# Altium PCB 磁悬浮.PcbDoc
Units mm, origin at the board's own origin, x right, y up, seen from the top; angles counter-clockwise.
Board outline 105.83 x 105.83 mm, 2 copper layers (Top Layer, Bottom Layer), stack 1.58 mm thick; 88 components, 57 nets, 297 pads, 271 vias.
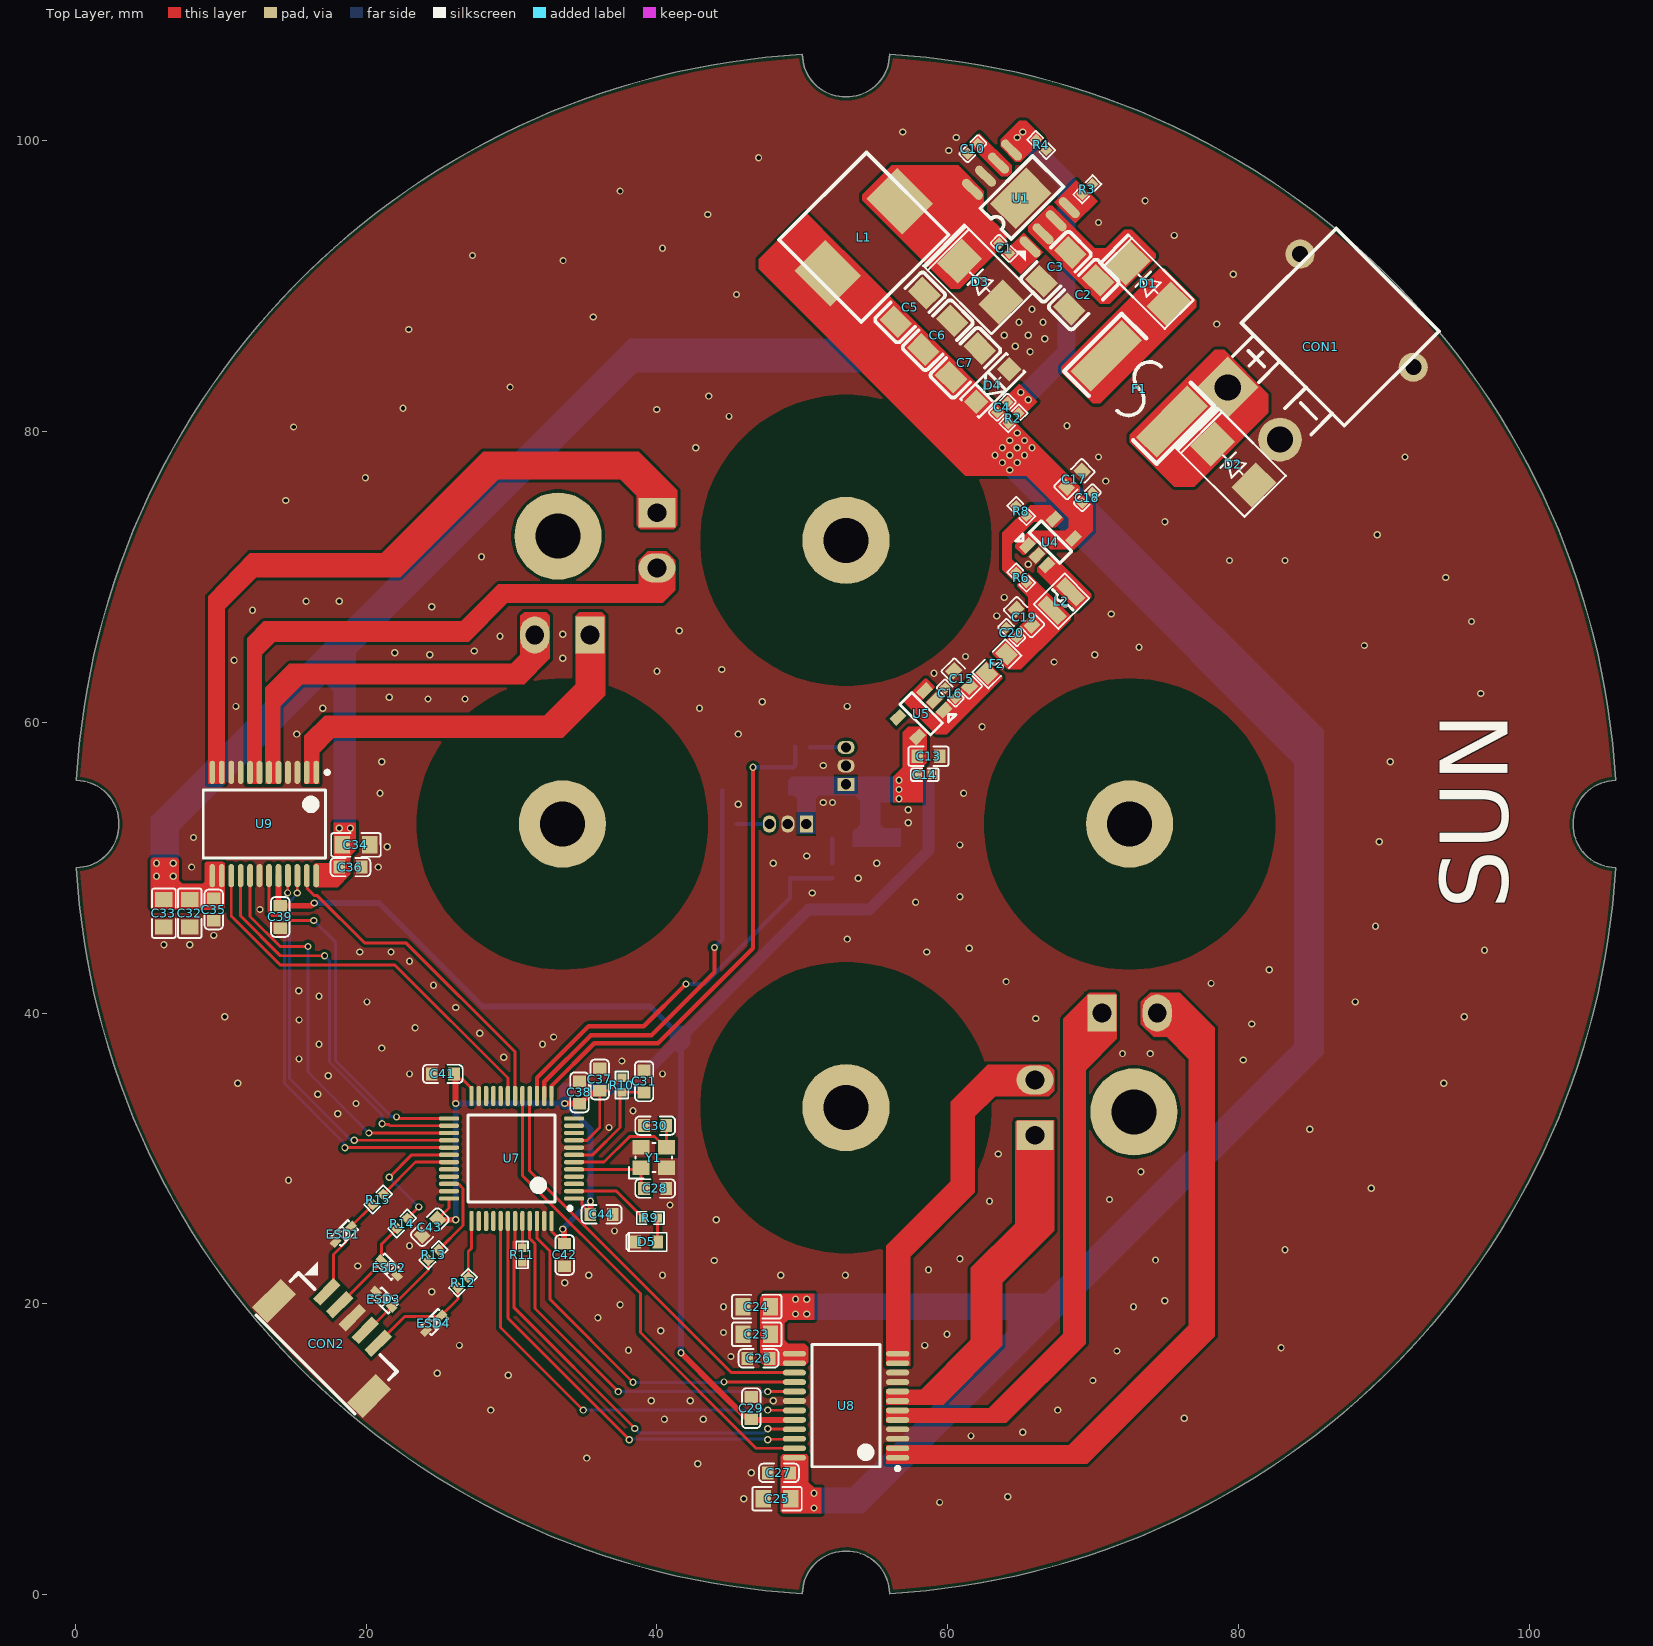
[diagram p0: Top Layer view]
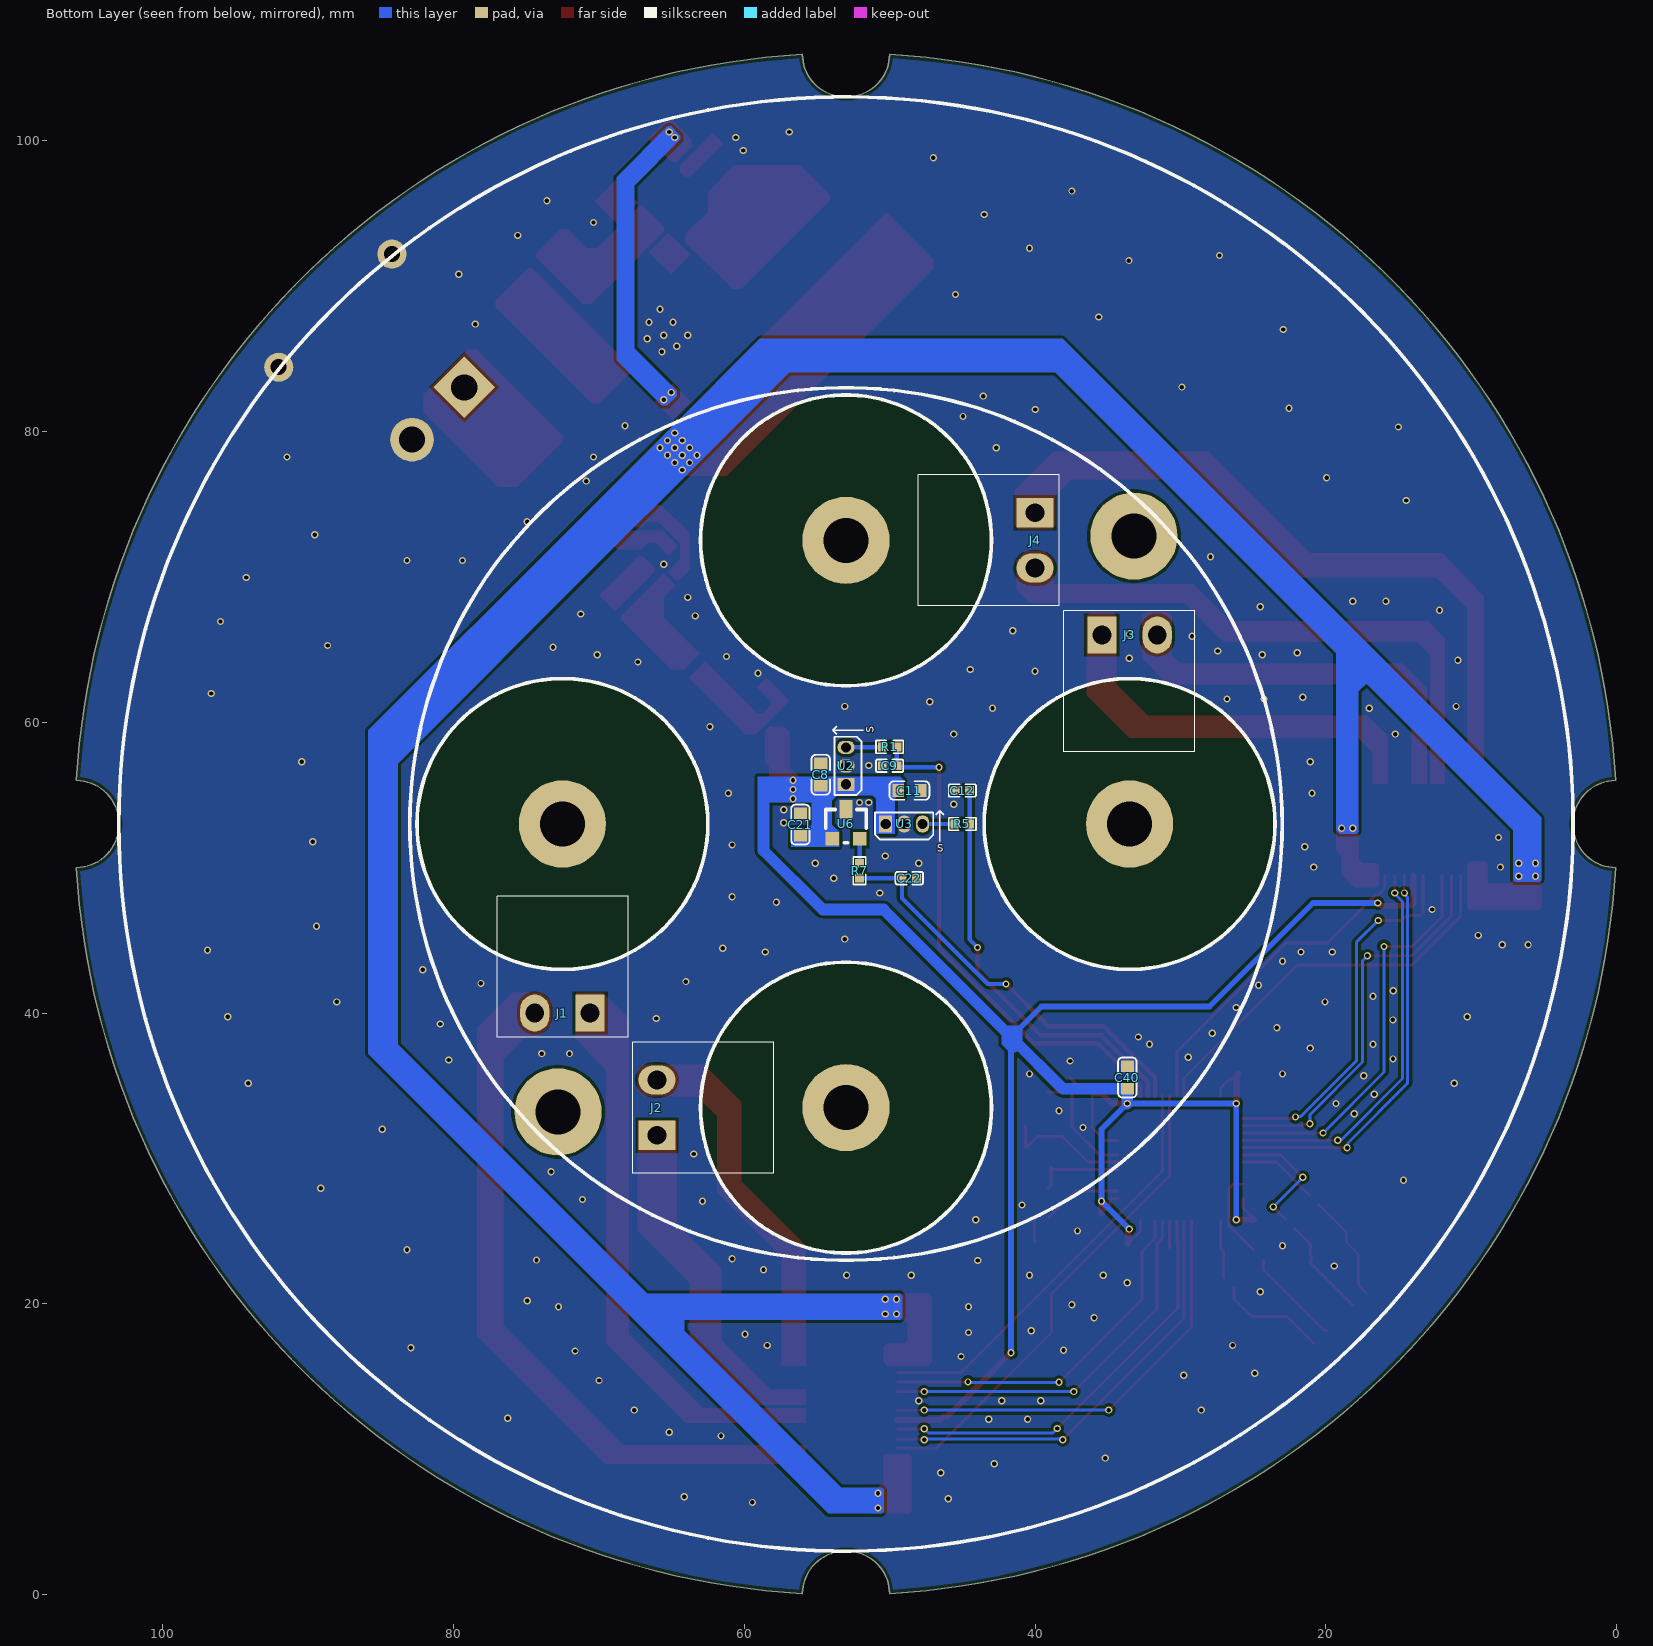
[diagram p1: Bottom Layer view, seen from below]
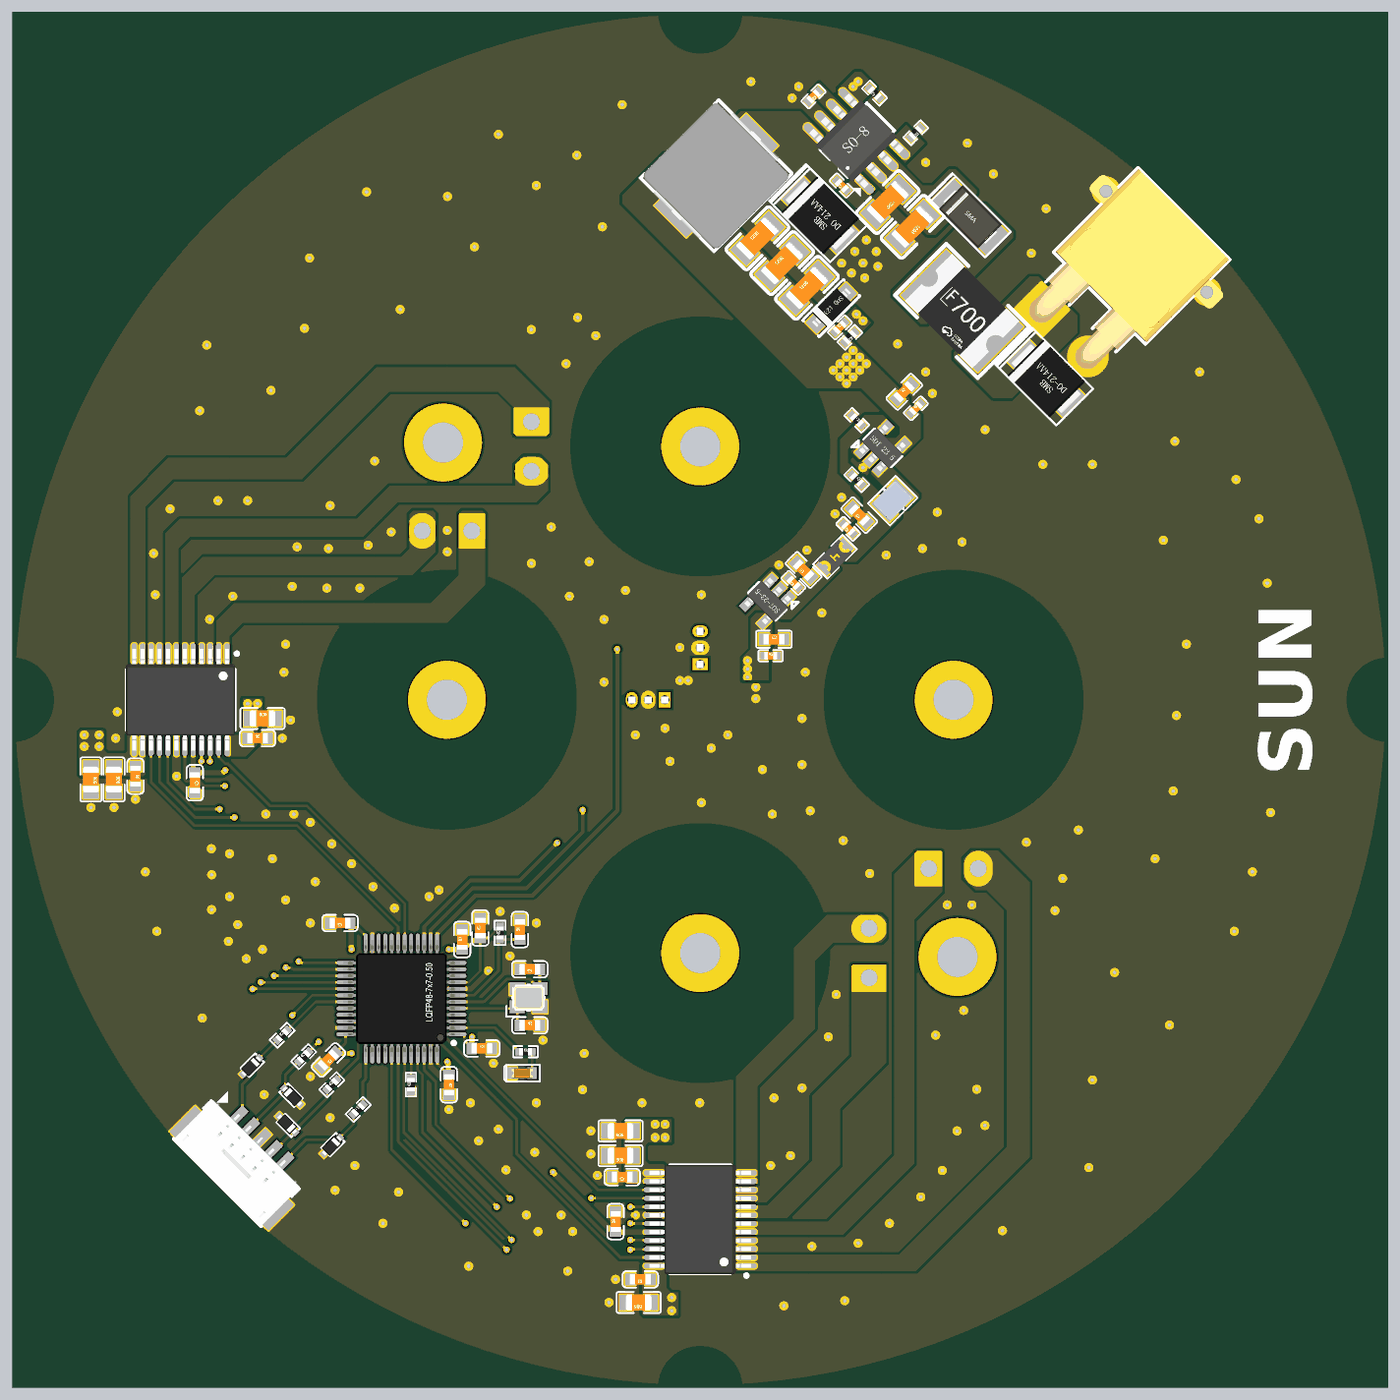
[diagram p2: 3D render of the assembled board from above, using the file's embedded part models]
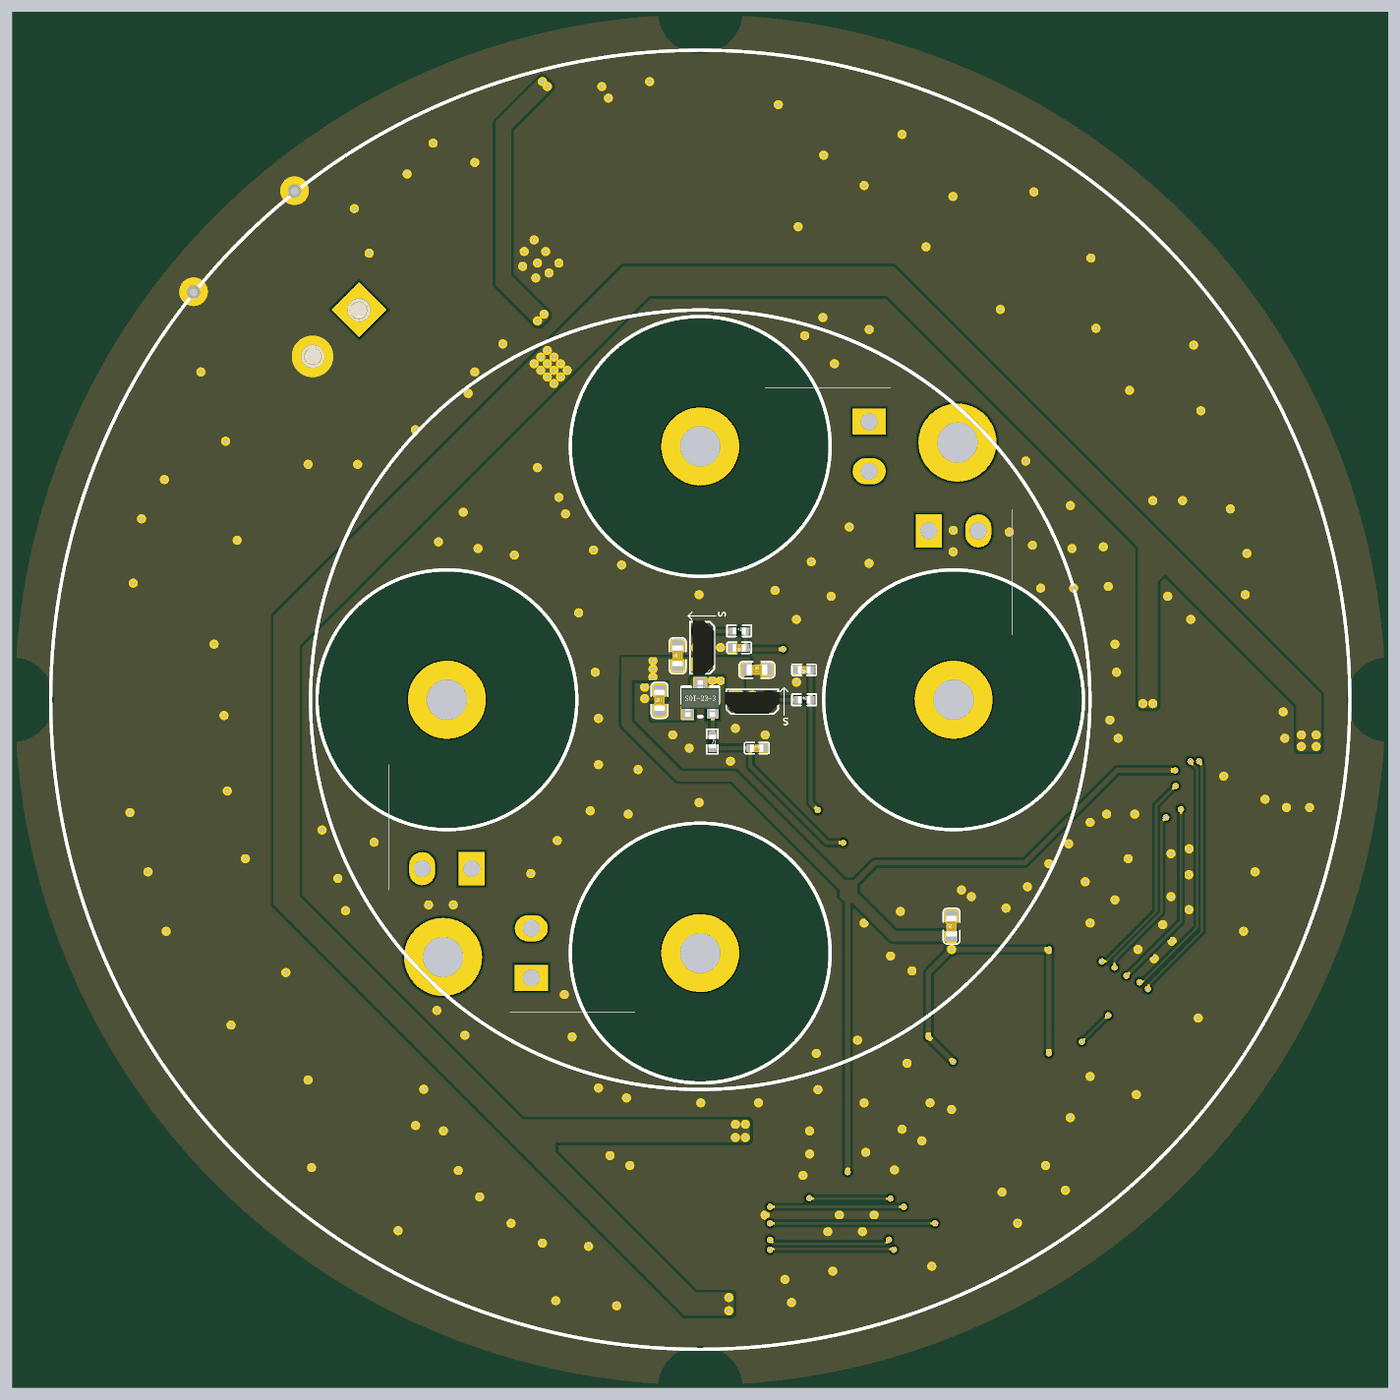
[diagram p3: 3D render of the assembled board from below, using the file's embedded part models]

## Layer stack, top to bottom
Top Solder: solder mask 0.0102, Solder Resist, Dk 3.5
Top Layer: signal copper 0.0356
Dielectric 1: dielectric 1.5086, FR-4, Dk 4.8
Bottom Layer: signal copper 0.0356
Bottom Solder: solder mask 0.0102, Solder Resist, Dk 3.5

## Board outline
0.085,50.001 ccw(c0.043,52.958) 3,53 ccw(c0.043,53.042) 0.085,55.999 cw(c53,53) 50.001,105.915 ccw(c52.96,105.959) 53.004,103 52.996,103 ccw(c53.04,105.959) 55.999,105.915 cw(c53,53) 105.915,55.999 ccw(c105.959,53.04) 103,52.996 ccw(c105.955,52.956) 105.915,50.001 cw(c53,53) 55.999,0.085 ccw(c53.042,0.043) 53,3 ccw(c52.958,0.043) 50.001,0.085 cw(c53,53)

## Design rules (kind name [scope] priority, off if disabled: settings)
BoardOutlineClearance [All] p1: gap=0.254 ignorepadtopadclearanceinfootprint=FALSE except(0: Arc-SplitContinuation Track-SplitContinuation SMDPad-SplitContinuation THPad-SplitContinuation Via-SplitContinuation Fill-SplitContinuation Poly-SplitContinuation Region-SplitContinuation Text-SplitContinuation)
Clearance [All] p1: gap=0.203 ignorepadtopadclearanceinfootprint=FALSE except(0.152: Arc-Arc Arc-Track Arc-SMDPad Arc-THPad Arc-Via Arc-Text Arc-Hole Track-Track Track-SMDPad Track-THPad Track-Via Track-Text Track-Hole SMDPad-SMDPad SMDPad-THPad SMDPad-Via SMDPad-Text SMDPad-Hole THPad-THPad THPad-Via THPad-Text THPad-Hole Via-Via Via-Text Via-Hole Text-Text Text-Hole)
HoleSize [All] p1: absolutevalues=TRUE maxlimit=3.81 minlimit=0.025 maxpercent=80.000 minpercent=20.000
HoleToHoleClearance [All] p1: gap=0 allowstackedmicrovias=TRUE
MinimumSolderMaskSliver [All] p1: minsoldermaskwidth=0
PolygonConnect [All] p1: connectstyle=Direct reliefconductorwidth=0.254 reliefentries=4 polygonreliefangle="90 Angle" airgapwidth=0.254
RoutingVias [All] p1: holewidth=0.3 width=0.5 viastyle="Through Hole" minholewidth=0.3 minwidth=0.5 maxholewidth=0.711 maxwidth=1.27
SilkToSilkClearance [All] p1: silktosilkclearance=0
SilkToSolderMaskClearance [IsPad] p1: minsilkscreentomaskgap=0 clearancetoexposedcopper=TRUE
SolderMaskExpansion [All] p1: expansion=0.102 istentingtop=FALSE
SupplyNets "Schematic Supply Nets_3" [InNet('GND')] p1: voltage=0.000
SupplyNets "Schematic Supply Nets_2" [InNet('3.3V')] p2: voltage=0.000
SupplyNets "Schematic Supply Nets_1" [InNet('+5V')] p3: voltage=0.000
SupplyNets "Schematic Supply Nets" [InNet('+12V')] p4: voltage=0.000
Width [All] p1: maxlimit=1 minlimit=0.15 preferedwidth=0.2
25 further rules are at their usual default settings.

## Components (designator, comment, footprint, x,y, rotation, side; value= is the part's Value field where it differs from the comment)
C1 "100nF/50V" C0402 63.881,92.583 r135 top
C2 "10uF/50V" C1206 69.342,89.408 r225 top
C3 "10uF/50V" C1206 67.437,91.313 r225 top
C4 "330pF/50V" C0402 63.754,81.661 r45 top
C5 "47uF/25V" C1206 57.404,88.519 r45 top
C6 "47uF/25V" C1206 59.309,86.614 r45 top
C7 "47uF/25V" C1206 61.214,84.709 r45 top
C8 "0603/100nF/50V" C0603 54.737,56.388 r90 bottom
C9 "10nF/50V" C0402 50,57 r0 bottom
C10 "100nF/50V" C0402 61.722,99.441 r225 top
C11 "0603/100nF/50V" C0603 48.641,55.3 r180 bottom
C12 "10nF/50V" C0402 45,55.3 r0 bottom
C13 "10uF/10V" C0603 58.674,57.658 r0 top
C14 "100nF/50V" C0402 58.42,56.388 r0 top
C15 "10uF/25V" C0603 60.96,62.992 r135 top
C16 "100nF/50V" C0402 60.171,62.003 r135 top
C17 "4.7uF/25V" C0603 68.707,76.708 r45 top
C18 "100nF/50V" C0402 69.596,75.438 r45 top
C19 "22uF/10V" C0603 65.242,67.219 r135 top
C20 "100nF/50V" C0402 64.389,66.167 r135 top
C21 "0603/100nF/50V" C0603 56.134,52.959 r90 bottom locked
C22 "10nF/50V" C0402 48.649,49.276 r180 bottom locked
C23 "10uF/25V" C0805 46.863,17.907 r180 top
C24 "10uF/25V" C0805 46.863,19.812 r180 top
C25 "10uF/25V" C0805 48.26,6.604 r180 top
C26 "0603/100nF/50V" C0603 46.99,16.256 r180 top
C27 "0603/100nF/50V" C0603 48.387,8.382 r180 top
C28 "10pF/50V/0603/C0G" C0603 39.878,27.94 r0 top
C29 "0603/100nF/50V" C0603 46.482,12.827 r90 top
C30 "10pF/50V/0603/C0G" C0603 39.878,32.258 r180 top
C31 "0603/100nF/50V" C0603 39.116,35.306 r90 top
C32 "10uF/25V" C0805 7.874,46.863 r270 top
C33 "10uF/25V" C0805 6.096,46.863 r270 top
C34 "10uF/25V" C0805 19.304,51.562 r0 top
C35 "0603/100nF/50V" C0603 9.525,47.117 r270 top
C36 "0603/100nF/50V" C0603 18.923,50.038 r0 top
C37 "0603/100nF/50V" C0603 36.068,35.433 r90 top
C38 "0603/10uF/10V" C0603 34.671,34.544 r90 top
C39 "0603/100nF/50V" C0603 14.097,46.609 r270 top
C40 "0603/10uF/10V" C0603 33.655,35.568 r90 bottom
C41 "0603/100nF/50V" C0603 25.273,35.814 r180 top
C42 "0603/100nF/50V" C0603 33.655,23.368 r270 top
C43 "0603/100nF/50V" C0603 24.384,25.273 r225 top
C44 "0603/100nF/50V" C0603 36.195,26.162 r0 top
CON1 "XT30PW-M" XT30PW-M 85.3,85.3 r135 top locked
CON2 "BM05B-GHS-TBT" GH1.25_5LT 18,18 r315 top locked
D1 "SS36" SMA(DO-214AC) 73.787,90.17 r135 top
D2 "SMBJ30CA" SMB(DO-214AA) 79.629,77.724 r135 top
D3 "SS56" SMB(DO-214AA) 62.23,90.297 r135 top
D4 "SMF12CA" SOD123 63.119,83.185 r225 top
D5 "NCD0603R1" LED0603 39.29,24.257 r180 top
ESD1 "PESD3V3S1BA-N" SOD523 18.437,24.787 r225 top
ESD2 "PESD3V3S1BA-N" SOD523 21.59,22.479 r315 top
ESD3 "PESD3V3S1BA-N" SOD523 21.209,20.32 r135 top
ESD4 "PESD3V3S1BA-N" SOD523 24.638,18.669 r225 top
F1 "30V/2.5A" F2920 73.152,82.931 r315 top
F2 "16V/500mA" F0805 63.373,64.008 r225 top
J1 "CON2" "MC 1,5/2-G-3,81" 72.5,40 r0 bottom locked
J2 "CON2" "MC 1,5/2-G-3,81" 66,33.5 r90 bottom locked
J3 "CON2" "MC 1,5/2-G-3,81" 33.5,66 r180 bottom locked
J4 "CON2" "MC 1,5/2-G-3,81" 40,72.5 r270 bottom locked
L1 "15uH/5.4A" CD080538 54.229,93.345 r225 top
L2 "10uH/1.2A" NR2520 67.818,68.326 r225 top
R1 "10R" R0402#1 50,58.3 r180 bottom
R2 "150K" R0402#1 64.516,80.899 r225 top
R3 "45.3K" R0402#1 69.596,96.647 r225 top
R4 "10K" R0402#1 66.421,99.695 r135 top
R5 "10R" R0402#1 45,53 r180 bottom
R6 "105K" R0402#1 65.051,69.95 r315 top
R7 "10R" R0402#1 52.07,49.784 r270 bottom
R8 "20K" R0402#1 65.051,74.522 r315 top
R9 "10K" R0402#1 39.552,25.908 r0 top
R10 "10K" R0402#1 37.592,35.052 r90 top
R11 "1K/0402/5%" R0402#2 30.734,23.368 r90 top
R12 "100R" R0402#1 26.67,21.463 r45 top
R13 "100R" R0402#1 24.638,23.368 r45 top
R14 "100R" R0402#1 22.479,25.527 r45 top
R15 "100R" R0402#1 20.828,27.178 r45 top
U1 "LMR16030PDDAR" SOP8-9 65.024,96.012 r135 top
U2 "HX6286UA" TO-92S 53,57 r90 bottom locked
U3 "HX6286UA" TO-92S 49,53 r180 bottom locked
U4 "TPS560200DBVR" SOT23-5 67.056,72.39 r45 top
U5 "SPX3819M5-L-3-3/TR" SOT23-5 58.166,60.579 r225 top
U6 "HX6286ESO" SOT23 53,53 r180 bottom locked
U7 "STM32F103C8T6" LQFP48 30,30 r180 top locked
U8 "TB6612" SSOP-24_208mil 53,13 r180 top locked
U9 "TB6612" SSOP-24_208mil 13,53 r270 top locked
Y1 "X322512MOB4SI" XTAL_2520 39.786,30.064 r0 top

## Footprints (in the part's own frame and the unit in brackets; to place one, negate y for a bottom-side part, rotate by r counter-clockwise, add the part's x,y. Pads: shape width x height; smd on the part's side, far side on the other; paste and mask are expansions set on the pad)
C0402 [mm]
  rect 0.6x0.6 smd mask+0.05: 1(-0.5,0) 2(0.5,0)
  silkscreen extent -0.94,-0.43 0.94,0.43, body extent -0.5,-0.3 0.5,0.3, height 0.2
C0603 [mm]
  rect 0.8x0.9 smd: 1(-0.77,0) 2(0.77,0)
  silkscreen extent -1.37,-0.64 1.37,0.64, body extent -0.8,-0.4 0.8,0.4, height 0.3
C0805 [mm]
  rect 1.05x1.2 smd: 1(-0.95,0) 2(0.95,0)
  silkscreen extent -1.7,-0.81 1.7,0.81, body extent -1,-0.63 1,0.63, height 0.78
C1206 [mm]
  rect 1.4x1.8 smd: 1(-1.4,0) 2(1.4,0)
  silkscreen extent -2.37,-1.18 2.37,1.18, body extent -1.6,-0.8 1.6,0.8, height 1
CD080538 [mm]
  rect 3x3.5 smd: 1(-3.5,0) 2(3.5,0)
  silkscreen extent -4.25,-4 4.25,4, body extent -4.4,-4.11 4.4,4.1, height 3.8
F0805 [mm]
  rect 1.05x1.2 smd: 1(-0.95,0) 2(0.95,0)
  silkscreen extent -1.6,-0.79 1.6,0.79, body extent -1.15,-0.75 1.15,0.75, height 0.86
F2920 [mm]
  rect 2x5 smd: 1(3.2,0) 2(-3.2,0)
  silkscreen extent -4.5,-2.8 4.5,2.8, body extent -3.68,-2.56 3.68,2.56, height 0.5
GH1.25_5LT [mm]
  rect 0.7x2 smd: 1(-2.5,1.5) 2(-1.25,1.5) 3(0,1.5) 4(1.25,1.5) 5(2.5,1.5)
  rect 1.5x2.8 smd: A(-4.635,-1.5) B(4.635,-1.5)
  silkscreen extent -4.79,-3.06 4.79,2.52, body extent -4.75,-3.06 4.75,1.86, height 4.15
LED0603 [mm]
  rect 0.737x0.9 smd: 1(0.77,0) 2(-0.77,0)
  silkscreen extent -1.38,-0.64 1.38,0.64, body extent -0.81,-0.4 0.81,0.4, height 0.6
LQFP48 [mm] "Thin QFP, 48-Leads, Body 7x7mm, Pitch 0.5mm, IPC High Density"
  oval 1.4x0.3 smd: 1(-4.3,2.75) 2(-4.3,2.25) 3(-4.3,1.75) 4(-4.3,1.25) 5(-4.3,0.75) 6(-4.3,0.25) 7(-4.3,-0.25) 8(-4.3,-0.75) 9(-4.3,-1.25) 10(-4.3,-1.75) 11(-4.3,-2.25) 12(-4.3,-2.75) 25(4.3,-2.75) 26(4.3,-2.25) 27(4.3,-1.75) 28(4.3,-1.25) 29(4.3,-0.75) 30(4.3,-0.25) 31(4.3,0.25) 32(4.3,0.75) 33(4.3,1.25) 34(4.3,1.75) 35(4.3,2.25) 36(4.3,2.75)
  oval 0.3x1.4 smd: 13(-2.75,-4.3) 14(-2.25,-4.3) 15(-1.75,-4.3) 16(-1.25,-4.3) 17(-0.75,-4.3) 18(-0.25,-4.3) 19(0.25,-4.3) 20(0.75,-4.3) 21(1.25,-4.3) 22(1.75,-4.3) 23(2.25,-4.3) 24(2.75,-4.3) 37(2.75,4.3) 38(2.25,4.3) 39(1.75,4.3) 40(1.25,4.3) 41(0.75,4.3) 42(0.25,4.3) 43(-0.25,4.3) 44(-0.75,4.3) 45(-1.25,4.3) 46(-1.75,4.3) 47(-2.25,4.3) 48(-2.75,4.3)
  silkscreen extent -4.15,-3 3,3.55, body extent -4.5,-4.5 4.5,4.5, height 1.45
"MC 1,5/2-G-3,81" [mm] "MC 1,5/2-G-3,81"
  rect 2x2.54 hole 1.3: 1(-1.905,0)
  oval 2x2.54 hole 1.3: 2(1.905,0)
  silkscreen extent -4.52,-8.03 4.49,1.65
NR2520 [mm]
  rect 0.9x2 smd: 1(-0.9,0) 2(0.9,0)
  silkscreen extent -1.5,-1.2 1.5,1.2, body extent -1.26,-1 1.26,1, height 1.21
R0402#1 [mm]
  rect 0.6x0.6 smd mask+0.05: 1(-0.5,0) 2(0.5,0)
  silkscreen extent -0.94,-0.43 0.94,0.43, body extent -0.5,-0.3 0.5,0.3, height 0.2
R0402#2 [mm]
  rect 0.6x0.6 smd: 1(-0.5,0) 2(0.5,0)
  silkscreen extent -0.91,-0.41 0.91,0.41, body extent -0.5,-0.3 0.5,0.3, height 0.2
SMA(DO-214AC) [mm]
  rect 2x2.4 smd: 1(2,0) 2(-2,0)
  silkscreen extent -3,-1.4 3.38,1.4, body extent -2.35,-1.3 2.35,1.3, height 2.1
SMB(DO-214AA) [mm]
  rect 2x2.4 smd: 1(2,0) 2(-2,0)
  silkscreen extent -3.1,-2 3.55,2, body extent -2.8,-1.95 2.8,1.95, height 2.5
SOD123 [mm]
  rect 1.2x1.2 smd: 1(1.646,-0.001) 2(-1.554,-0.001)
  silkscreen extent -2.18,-0.9 2.27,0.9, body extent -1.85,-0.8 1.85,0.8, height 1.2
SOD523 [mm]
  rect 0.7x0.5 smd: 1(-0.75,0) 2(0.75,0)
  silkscreen extent -0.91,-0.48 0.68,0.48, body extent -0.9,-0.45 0.9,0.45, height 0.8
SOP8-9 [mm]
  oval 1.8x0.61 smd: 1(-2.8,1.905) 2(-2.8,0.635) 3(-2.8,-0.635) 4(-2.8,-1.905) 5(2.8,-1.905) 6(2.8,-0.635) 7(2.8,0.635) 8(2.8,1.905)
  rect 2.5x3.5 smd: 9(0,0)
  silkscreen extent -3.3,-2.64 1.5,2.82, body extent -3,-2.45 3,2.45, height 1.7
SOT23 [mil]
  rect 36x36 smd: 1(-37.5,-40) 2(37.5,-40)
  rect 36x50 smd: 3(0,40)
  silkscreen extent -55,-51 55,39, body extent -57,-51 57,59, height 47
SOT23-5 [mil]
  rect 39x27 smd: 1(-50.98,37.4) 2(-50.98,0) 3(-50.98,-37.4) 4(50.98,-37.4) 5(50.98,37.4)
  silkscreen extent -65,-59 23,68, body extent -56,-57 54,58, height 47
SSOP-24_208mil [mm] "SOP, 24-Leads, Body 8.20x5.30mm, Pitch 0.65mm, IPC Medium Density"
  oval 1.6x0.4 smd: 1(-3.55,3.575) 2(-3.55,2.925) 3(-3.55,2.275) 4(-3.55,1.625) 5(-3.55,0.975) 6(-3.55,0.325) 7(-3.55,-0.325) 8(-3.55,-0.975) 9(-3.55,-1.625) 10(-3.55,-2.275) 11(-3.55,-2.925) 12(-3.55,-3.575) 13(3.55,-3.575) 14(3.55,-2.925) 15(3.55,-2.275) 16(3.55,-1.625) 17(3.55,-0.975) 18(3.55,-0.325) 19(3.55,0.325) 20(3.55,0.975) 21(3.55,1.625) 22(3.55,2.275) 23(3.55,2.925) 24(3.55,3.575)
  silkscreen extent -3.68,-4.2 2.35,4.45, body extent -3.9,-4.2 3.9,4.2, height 1.85
TO-92S [mm]
  rect 0.9x1.2 hole 0.7 mask+0.102: 1(-1.27,0)
  oval 0.9x1.2 hole 0.7 mask+0.102: 2(0,0) 3(1.27,0)
  silkscreen extent -2,-1.17 2.73,0.92, body extent -2.1,-1.09 2.1,0.58, height 6.78
XT30PW-M [mm]
  rect 3x3 hole 1.8: 1(2.667,5.888)
  round 3 hole 1.8: 2(-2.413,5.888)
  round 2 hole 1.1: A(-5.373,-4.112) B(5.627,-4.112)
  silkscreen extent -4.87,-7.11 5.13,4.12, body extent -6.55,-7.08 6.75,6.87, height 5
XTAL_2520 [mm]
  rect 1.15x1 smd: 1(-0.875,-0.7) 2(0.875,-0.7) 3(0.875,0.7) 4(-0.875,0.7)
  silkscreen extent -1.7,-1.45 1.25,1, body extent -1.25,-1 1.25,1, height 0.8

## Part data
C1 C10 C14 C16 C18 C20: library part 0402/100nF/50V/±10％, "=规格", 参数=100nF/50V, 物料名称=贴片电容, 规格=0402/100nF/50V/±10％
  C1 C10 C18 C20: 厂商型号=±10％, 序号=10053
  C14 C16: 序号=10041
C2 C3: library part 1206/10uF/50V/±20％, "=规格", 厂商型号=±20％, 参数=10uF/50V, 序号=10149, 物料名称=贴片电容, 规格=1206/10uF/50V/±20％
C4: library part 0402/330pF/50V/±10％, "=规格", 厂商型号=±10％, 参数=330pF/50V, 序号=10026, 物料名称=贴片电容, 规格=0402/330pF/50V/±10％
C5 C6 C7: library part 1206/47uF/25V/±20％, "=规格", 厂商型号=±20％, 参数=47uF/25V, 序号=10154, 物料名称=贴片电容, 规格=1206/47uF/25V/±20％
C8 C11 C21 C26 C27 C29 C31 C35 C36 C37 C39 C41 C42 C43 C44: library part C0603, "0603/100nF/50V/X7R/±10％/GRM188R71H104KA93D"
C9 C12 C22: library part 0402/10nF/50V/±10％, "=规格", 参数=10nF/50V, 序号=10048, 物料名称=贴片电容, 规格=0402/10nF/50V/±10％
C13: library part 0603/10uF/10V/±10％, "=规格", 参数=10uF/10V, 序号=10091, 物料名称=贴片电容, 规格=0603/10uF/10V/±10％
C15: library part 0603/10uF/25V/±20％, "=规格", 厂商型号=±20％, 参数=10uF/25V, 序号=10125, 物料名称=贴片电容, 规格=0603/10uF/25V/±20％
C17: library part 0603/4.7uF/25V/±10％, "=规格", 厂商型号=±10％, 参数=4.7uF/25V, 序号=10122, 物料名称=贴片电容, 规格=0603/4.7uF/25V/±10％
C19: library part 0603/22uF/10V/±20％, "=规格", 厂商型号=±20％, 参数=22uF/10V, 序号=10127, 物料名称=贴片电容, 规格=0603/22uF/10V/±20％
C23 C24 C25 C32 C33 C34: library part 0805/10uF/25V/±10％, "=规格", 参数=10uF/25V, 序号=10080, 物料名称=贴片电容, 规格=0805/10uF/25V/±10％
C28 C30: library part C0603, "0603/10pF/50V/C0G/±5％/GCM1885C1H100JA16D"
C38 C40: library part C0603, "0603/10uF/10V/X7R/±10％/GRM188Z71A106KA73D"
CON1: library part XT30/公头/4PIN/卧插/XT30PW-M, "=规格", 厂商名称=AMASS(艾迈斯), 厂商型号=XT30PW-M, 参数=XT30PW-M, 序号=110171, 物料名称=连接座, 物料编号=C431092, 规格=XT30/公头/4PIN/卧插/XT30PW-M, 购买连接=https://item.szlcsc.com/426930.html
CON2: library part GH1.25mm/5PIN/立贴/BM05B-GHS-TBT, "=规格", 厂商名称=JST, 厂商型号=BM05B-GHS-TBT(LF)(SN), 参数=BM05B-GHS-TBT, 序号=110048, 物料名称=连接座, 物料编号=C189891, 规格=GH1.25mm/5PIN/立贴/BM05B-GHS-TBT, 购买连接=https://item.szlcsc.com/207056.html
D1: library part SMA/60V/3A/单向/肖特基二极管/SS36（长电）, "=规格", 厂商名称=CJ(江苏长电/长晶), 厂商型号=SS36, 参数=SS36, 参数2="二极管配置：独立式 正向压降(Vf)：700mV@3A 直流反向耐压(Vr)：60V 平均整流电流(Io)：3A", 序号=40022, 物料名称=肖特基二极管, 物料编号=C2923967, 规格=SMA/60V/3A/单向/肖特基二极管/SS36（长电）, 购买连接=https://item.szlcsc.com/3237782.html
D2: library part SMB/30V/12.4A/双向/TVS元件/SMBJ30CA（伯恩）, "=规格", 厂商名称=BORN(伯恩半导体), 厂商型号=SMBJ30CA, 参数=SMBJ30CA, 参数2="最大钳位电压：48.4V峰值脉冲电流(Ipp)@10/1000us：12.4A 击穿电压：33.3V", 序号=40070, 物料名称=TVS元件, 物料编号=C152098, 规格=SMB/30V/12.4A/双向/TVS元件/SMBJ30CA（伯恩）, 购买连接=https://item.szlcsc.com/163438.html?fromZone=s_s__%2522C152098%2522
D3: library part SMB/60V/5A/单向/肖特基二极管/SS56（长电）, "=规格", 厂商名称=LGE(鲁光), 厂商型号=SS56, 参数=SS56, 参数2="正向压降(Vf)：700mV@5A 直流反向耐压(Vr)：60V 平均整流电流(Io)：5A", 序号=40028, 物料名称=肖特基二极管, 物料编号=C402303, 规格=SMB/60V/5A/单向/肖特基二极管/SS56（长电）, 购买连接=https://item.szlcsc.com/387448.html?fromZone=s_s__%2522C402303%2522
D4: library part SOD123/12V/10A/双向/TVS元件/SMF12CA（长电）, "=规格", 厂商名称=CJ(江苏长电/长晶), 厂商型号=SMF12CA, 参数=SMF12CA, 参数2="反向截止电压(Vrwm)：12V 最大钳位电压：19.9V 峰值脉冲电流(Ipp)@10/1000us：10.1A 击穿电压：13.3V", 序号=40059, 物料名称=TVS元件, 物料编号=C2961203, 规格=SOD123/12V/10A/双向/TVS元件/SMF12CA（长电）, 购买连接=https://item.szlcsc.com/3349401.html?fromZone=s_s__%2522C2961203%2522
D5: library part 0603/20mA/红灯/发光二极管/NCD0603R1, "=规格", 厂商名称=国星光电, 厂商型号=NCD0603R1, 参数=NCD0603R1, 参数2="发光颜色：红色 正向电压(VF)：1.6V~2.6V 功率：65mW 正向电流：20mA 主波长：615nm~630nm 二极管配置：独立二极管 透镜颜色：无色透明透镜 发光强度：80mcd~220mcd 发光角度：130° 工作温度：-30℃~+85℃", 序号=40004, 物料名称=发光二极管, 物料编号=C84263, 规格=0603/20mA/红灯/发光二极管/NCD0603R1, 购买连接=https://item.szlcsc.com/85432.html
ESD1 ESD2 ESD3 ESD4: library part "SOD523/TVS保护/双向/PESD3V3S1BA-N TVS", "=规格", 厂商名称=BORN(伯恩半导体), 厂商型号=PESD3V3S1BA-N, 参数=PESD3V3S1BA-N, 参数2="反向截止电压(Vrwm)：3.3V 最大钳位电压：10V 峰值脉冲电流(Ipp)@10/1000us：10A@8/20us 击穿电压：4V", 序号=40055, 物料名称=TVS, 物料编号=C316037, 规格="SOD523/TVS保护/双向/PESD3V3S1BA-N TVS", 购买连接=https://item.szlcsc.com/297725.html
F1: library part 2920/30V/2.5A/自恢复保险丝/SMD250L-30V, "=规格", 厂商名称=台湾陆海, 厂商型号=SMD250L-30V, 参数=30V/2.5A, 参数2="最大电压：30V 最大电流：100A 保持电流：2.5A 跳闸电流：5A", 序号=60027, 物料名称=保险丝, 物料编号=C2937112, 规格=2920/30V/2.5A/自恢复保险丝/SMD250L-30V, 购买连接=https://item.szlcsc.com/3290736.html
F2: library part 0805/16V/500mA/自恢复保险丝/SMD0805-050-16V, "=规格", 厂商名称=台湾陆海, 厂商型号=SMD0805-050-16V, 参数=16V/500mA, 参数2="最大电压：16V 最大电流：100A 保持电流：500mA 跳闸电流：1A", 序号=60012, 物料名称=保险丝, 物料编号=C2833485, 规格=0805/16V/500mA/自恢复保险丝/SMD0805-050-16V, 购买连接=https://item.szlcsc.com/2994209.html
J1 J2 J3 J4: "Connector"
L1: library part SMD,8.8x8.2x3.8mm/15uH/5.4A/±20％/FXL0840-150-M, "=规格", 厂商名称=cjiang(长江微电), 厂商型号=FXL0840-150-M, 参数=15uH/5.4A, 参数2="电感值：15uH 精度：±20% 额定电流：5.4A 饱和电流(Isat)：5.5A 类型：一体成型电感", 序号=30049, 物料名称=功率电感, 物料编号=C5298372, 规格=SMD,8.8x8.2x3.8mm/15uH/5.4A/±20％/FXL0840-150-M, 购买连接=https://item.szlcsc.com/6046542.html?fromZone=s_s__%2522FXL0840-150-M%2522
L2: library part SMD,2x2.5x0.7mm/10uH/1.2A/±20%/FTC252012S100MBCA, "=规格", 厂商名称=cjiang(长江微电), 厂商型号=FTC252012S100MBCA, 参数=10uH/1.2A, 参数2="电感值：10uH 精度：±20% 额定电流：1.2A 饱和电流(Isat)：1.6A 类型：一体成型电感", 序号=30057, 物料名称=功率电感, 物料编号=C5832376, 规格=SMD,2x2.5x0.7mm/10uH/1.2A/±20%/FTC252012S100MBCA, 购买连接=https://item.szlcsc.com/6763496.html?fromZone=s_s__%2522FTC252012S100MBCA%2522
R1 R5 R7: library part 0402/10R/±1％/62.5mW/厚膜电阻, "=规格", 参数=10R, 序号=20009, 物料名称=贴片电阻, 规格=0402/10R/±1％/62.5mW/厚膜电阻
R2: library part 0402/150K/±1％/62.5mW/厚膜电阻, "=规格", 参数=150K, 参数1=150000, 序号=20117, 物料名称=贴片电阻, 规格=0402/150K/±1％/62.5mW/厚膜电阻
R3: library part 0402/45.3K/±1％/62.5mW/厚膜电阻, "=规格", 参数=45.3K, 参数1=45300, 序号=20092, 物料名称=贴片电阻, 规格=0402/45.3K/±1％/62.5mW/厚膜电阻
R4 R9 R10: library part 0402/10K/±1％/62.5mW/厚膜电阻, "=规格", 参数=10K, 参数1=10000, 序号=20061, 物料名称=贴片电阻, 规格=0402/10K/±1％/62.5mW/厚膜电阻
R6: library part 0402/105K/±1％/62.5mW/厚膜电阻, "=规格", 参数=105K, 参数1=105000, 序号=20111, 物料名称=贴片电阻, 规格=0402/105K/±1％/62.5mW/厚膜电阻
R8: library part 0402/20K/±1％/62.5mW/厚膜电阻, "=规格", 参数=20K, 参数1=20000, 序号=20075, 物料名称=贴片电阻, 规格=0402/20K/±1％/62.5mW/厚膜电阻
R11: library part R0402
R12 R13 R14 R15: library part 0402/100R/±1％/62.5mW/厚膜电阻, "=规格", 参数=100R, 参数1=100, 序号=20018, 物料名称=贴片电阻, 规格=0402/100R/±1％/62.5mW/厚膜电阻
U1: library part RT8059_79, "SO-8-EP/60V/3A/DCDC降压电源管理芯片/LMR16030SDDAR TI", PCB Footprint=SOP8-9
U2 U3: library part TO-92S/单极/霍尔开关/HX6286UA（华芯）, "=规格", 厂商名称=HUAXIN(华芯), 厂商型号=HX6286UA, 参数=HX6286UA, 参数2="电源电压： 2.5V~24V 类型：单极型 工作点(Gs)：60Gs~100Gs 释放点(Gs)：40Gs~80Gs  工作温度：-40℃~+125℃", 序号=90027, 物料名称=霍尔开关, 物料编号=C495735, 规格=TO-92S/单极/霍尔开关/HX6286UA（华芯）, 购买连接=https://item.szlcsc.com/507121.html
U4: library part SOT23-5/17V/500mA/DCDC降压/TPS560200DBVR（TI）, "=规格", 厂商名称=TI(德州仪器), 厂商型号=TPS560200DBVR, 参数=TPS560200DBVR, 参数2="功能类型：降压型 输出类型：可调 输入电压：2.7V~5.5V 输出电压：600mV~5.23V 输出电流(最大值)：1.5A", 序号=70042, 物料名称=电源芯片, 物料编号=C83671, 规格=SOT23-5/17V/500mA/DCDC降压/TPS560200DBVR（TI）, 购买连接=https://item.szlcsc.com/84836.html
U5: library part SOT23-5/16V-3.3V/500mA/LDO电源管理芯片/SPX3819M5-L-3-3/TR, "=规格", 厂商名称=MaxLinear(迈凌), 厂商型号=SPX3819M5-L-3-3/TR, 参数=SPX3819M5-L-3-3/TR, 参数2="输出类型：固定 最大输入电压：16V 输出电压：3.3V 最大输出电流：500mA 电源纹波抑制比(PSRR)：70dB 输出极性：正极", 序号=70012, 物料名称=电源芯片, 物料编号=C9055, 规格=SOT23-5/16V-3.3V/500mA/LDO电源管理芯片/SPX3819M5-L-3-3/TR, 购买连接=https://item.szlcsc.com/9575.html
U6: library part SOT23/单极/霍尔开关/HX6286ESO（华芯）, "=规格", 厂商名称=HUAXIN(华芯), 厂商型号=HX6286ESO, 参数=HX6286ESO, 参数2="类型：单极型 工作点(Gs)：60Gs~100Gs 释放点(Gs)：40Gs~80Gs", 序号=90026, 物料名称=霍尔开关, 物料编号=C495736, 规格=SOT23/单极/霍尔开关/HX6286ESO（华芯）, 购买连接=https://item.szlcsc.com/507122.html
Y1: library part XTAL_12MHz_20pF_2520, "SMD3225-4P/12MHz/12pF/±10PPM/无源晶振/", PCB DECAL=Y\SX-22_24MHZ, Source_Path=E:\ORCAD\ORCAD_10.3\TOOLS\CAPTURE\LIBRARY\DISCRETE.OLB

## Free pads (board coordinates)
  round 6 hole 3.1 mask+0.102: 2(33.201,72.799) 2(33.5,53) 2(53,33.5) 2(53,72.5) 2(72.5,53) 2(72.799,33.201)

## Via types
v1: diameter 0.5, hole 0.3, Top Layer to Bottom Layer, 271 vias

## Nets (pads, with @x,y where several pads share a name; then routed paths per layer and width w, separated by ;. In a path a pad name is that pad's centre, name@x,y a point inside that pad or via, vN(x,y) a via of type N, cw(c..) or ccw(c..) an arc to the next point about the centre after c; other vN are vias at no path point)
3.3V: C8.1 C11.1 C13.1 C14.1 C21.1 C29.1 C37.1 C38.1 C39.1 C40.1 C41.1 C42.1 C43.1 C44.1 R10.2 U2.1 U3.1 U5.5 U6.1 U7.1 U7.9 U7.24 U7.36 U7.48 U8.20 U9.20 | length 149
  Top Layer w0.2: C43.1 25.7,26.589 U7.36 ; C41.1@26.143,35.664 26.343,35.464 26.609,35.464 27.25,34.823 U7.24 ; U7.48 32.769,25.681 32.769,24.974 C42.1@33.605,24.138 ; U7.1 34.791,27.25 34.837,27.204 34.837,26.8 35.425,26.212 C44.1 ; U7.9 35.187,31.25 36.068,32.131 C37.1 36.703,34.663 R10.2
  Top Layer w0.4: U9.20 13.975,47.501 14.103,47.373 16.215,47.373 16.41,47.568 v1(16.437,47.568) ; C43.1 24.964,25.782 v1(26.162,25.781) v1(26.162,25.781) ; C41.1 26.143,35.714 26.143,35.664 26.143,33.801 v1(26.162,33.782) ; v1(33.528,25.146) 33.528,25.119 33.605,25.042 C42.1@33.605,24.138 ; v1(33.655,33.782) 33.659,33.778 34.667,33.778 C38.1 34.721,33.774 35.41,34.463 35.868,34.463 C37.1 ; C44.1 35.429,26.166 35.429,27.047 v1(35.433,27.051) ; v1(41.656,16.637) 44.258,14.035 46.036,12.257 46.282,12.257 C29.1 46.514,12.025 U8.20
  Bottom Layer w0.4: v1(16.437,47.568) 20.888,47.568 28.006,40.45 39.56,40.45 41.656,38.354 v1(41.656,16.637) ; v1(26.162,25.781) v1(26.162,33.782) v1(33.655,33.782) 35.433,32.004 v1(35.433,27.051) v1(33.528,25.146)
  Bottom Layer w0.8: v1(33.655,33.782) C40.1 38.1,34.798 41.656,38.354 50.419,47.117 54.61,47.117 58.674,51.181 58.674,54.633
  other v1: 56.642,54.737 56.642,55.372 56.642,56.007
+5V: C19.1 C20.1 F2.1 L2.2 R6.2
+12V: C4.1 C5.1 C6.1 C7.1 C17.1 C18.1 C23.1 C24.1 C25.1 C26.1 C27.1 C32.1 C33.1 C34.1 C35.1 C36.1 D4.1 L1.2 R2.2 U4.1 U4.4 U8.13 U8.14 U8.24 U9.13 U9.14 U9.24
  other v1: 50.8,5.969 50.8,6.985 49.53,19.304 50.292,19.304 49.53,20.32 50.292,20.32 5.588,49.403 6.731,49.403 5.588,50.292 6.731,50.292 18.161,52.705 18.923,52.705 64.262,77.343 63.754,77.851 64.77,77.851 63.246,78.359 64.262,78.359 65.278,78.359 63.754,78.867 64.77,78.867 65.786,78.867 64.262,79.375 65.278,79.375 64.77,79.883
AIN1: U7.43 U8.21 | length 29
  Top Layer w0.2: U7.43 30.25,24.341 30.182,24.273 30.182,19.729 v1(38.481,11.43) ; v1(47.625,11.423) 47.645,11.403 49.422,11.403 U8.21
  Bottom Layer w0.2: v1(38.481,11.43) 38.786,11.125 47.327,11.125 v1(47.625,11.423)
AIN2: U7.42 U8.22 | length 29.9
  Top Layer w0.2: U7.42 29.75,19.018 v1(38.1,10.668) ; v1(47.625,10.668) 47.654,10.697 49.422,10.697 U8.22
  Bottom Layer w0.2: v1(38.1,10.668) 38.154,10.722 47.571,10.722 v1(47.625,10.668)
AO1: J1.2 U8.1 U8.2
AO2: J1.1 U8.5 U8.6
BIN1: U7.45 U8.17 | length 26.4
  Top Layer w0.2: U7.45 31.25,24.503 31.623,24.13 31.623,19.685 v1(37.338,13.97) ; v1(47.625,13.97) 47.628,13.973 49.448,13.973 U8.17
  Bottom Layer w0.2: v1(37.338,13.97) v1(47.625,13.97)
BIN2: U7.46 U8.16 | length 24.9
  Top Layer w0.2: U7.46 31.75,24.511 32.639,23.622 32.639,20.32 v1(38.354,14.605) ; v1(44.609,14.637) 44.615,14.631 49.444,14.631 U8.16
  Bottom Layer w0.2: v1@38.37,14.605 44.577,14.605 v1(44.609,14.637)
BO1: J2.2 U8.11 U8.12
BO2: J2.1 U8.7 U8.8
CIN1: U7.29 U9.21 | length 27.7
  Top Layer w0.2: v1(14.603,48.261) 14.614,48.272 14.614,49.439 U9.21 ; v1(18.542,30.734) 18.558,30.75 U7.29
  Bottom Layer w0.2: v1(14.603,48.261) 14.603,48.18 14.38,47.957 14.38,35.169 18.489,31.059 18.489,30.787 v1(18.542,30.734)
CIN2: U7.28 U9.22 | length 26.9
  Top Layer w0.2: v1(15.257,48.26) 15.266,48.269 15.266,49.441 U9.22 ; v1(19.177,31.252) v1(19.177,31.252) 25.699,31.251 U7.28
  Bottom Layer w0.2: v1(15.257,48.26) 15.257,48.183 14.732,47.657 14.732,35.49 18.912,31.31 19.12,31.31 v1(19.177,31.252)
CO1: J3.1 U9.1 U9.2
CO2: J3.2 U9.5 U9.6
DIN1: U7.27 U9.17 | length 27.7
  Top Layer w0.2: U9.17 12.025,46.649 14.097,44.577 v1(16.002,44.577) ; v1(20.193,31.754) 20.195,31.752 25.698,31.752 U7.27
  Bottom Layer w0.2: v1(16.002,44.577) 16.002,35.941 20.189,31.754 v1(20.193,31.754)
DIN2: U7.26 U9.16 | length 27.5
  Top Layer w0.2: U9.16 11.375,46.664 14.097,43.942 v1(17.145,43.942) ; v1(21.101,32.392) 21.158,32.335 21.564,32.335 21.65,32.25 U7.26
  Bottom Layer w0.2: v1(17.145,43.942) 17.484,43.603 17.484,36.627 21.101,33.011 v1(21.101,32.392)
DO1: J4.1 U9.11 U9.12
DO2: J4.2 U9.7 U9.8
GND: C2.2 C3.2 C5.2 C6.2 C7.2 C8.2 C9.2 C10.2 C11.2 C12.2 C13.2 C14.2 C15.2 C16.2 C17.2 C18.2 C19.2 C20.2 C21.2 C22.2 C23.2 C24.2 C25.2 C26.2 C27.2 C28.2 C29.2 C30.2 C31.2 C32.2 C33.2 C34.2 C35.2 C36.2 C37.2 C38.2 C39.2 C40.2 C41.2 C42.2 C43.2 C44.2 CON1.2 CON1.A CON1.B CON2.3 CON2.A CON2.B D2.2 D3.2 D4.2 D5.1 ESD1.2 ESD2.2 ESD3.2 ESD4.2 R3.1 R4.1 R8.1 R11.1 U1.7 U1.9 U2.2 U3.2 U4.2 U5.2 U6.3 U7.8 U7.23 U7.35 U7.47 U8.3 U8.4 U8.9 U8.10 U8.18 U9.3 U9.4 U9.9 U9.10 U9.18 Y1.2 Y1.4
  other v1: 59.436,6.35 45.974,6.604 64.124,6.738 46.482,8.382 42.799,9.017 35.179,9.398 61.595,10.922 65.151,11.176 40.513,12.065 43.18,12.065 76.263,12.134 28.575,12.7 67.564,12.7 39.615,13.339 42.291,13.335 48.006,13.335 69.977,14.732 29.775,15.101 24.892,15.24 45.085,16.383 71.628,16.764 38.048,16.809 82.917,16.989 26.416,17.145 58.42,17.145 59.944,17.907 44.577,18.034 40.259,18.161 35.941,19.05 44.577,19.812 72.771,19.812 37.465,19.939 74.914,20.226 24.511,20.828 33.655,21.463 35.306,21.971 40.386,21.971 48.514,21.971 52.959,21.971 58.674,22.352 19.431,22.606 43.942,22.987 74.285,23.014 60.833,23.114 83.187,23.733 22.987,24.003 37.084,25.019 44.069,25.781 40.894,26.797 62.865,27.051 71.12,27.178 89.121,27.959 14.665,28.498 73.279,29.083 63.461,30.312 84.895,32.006 36.703,32.131 18.054,33.069 38.354,33.274 19.304,33.782 16.681,34.409 11.176,35.179 94.107,35.179 17.399,35.687 22.987,35.814 40.386,35.814 37.592,36.703 80.309,36.771 15.383,36.846 29.464,36.957 72.009,37.211 73.914,37.211 21.082,37.592 16.764,37.846 32.131,37.846 32.893,38.354 27.813,38.608 23.368,38.989 80.899,39.243 15.392,39.53 66.04,39.624 10.287,39.751 95.504,39.751 26.162,40.386 20.066,40.767 88.011,40.767 16.764,41.148 15.367,41.529 24.638,41.91 78.105,42.037 64.008,42.164 82.108,42.976 22.987,43.561 19.558,44.196 21.717,44.196 58.547,44.196 96.901,44.323 61.468,44.45 6.096,44.704 7.874,44.704 53.086,45.085 9.525,45.339 89.408,45.974 12.7,47.117 57.785,47.625 60.833,48.006 50.673,48.26 53.848,49.276 8.001,50.038 20.828,50.038 48.006,50.292 55.118,50.292 50.292,50.8 21.463,51.435 60.833,51.562 89.661,51.788 8.128,52.07 57.277,53.086 57.277,53.975 45.593,54.356 51.435,54.483 52.07,54.483 20.955,55.118 61.087,55.118 51.435,57.023 21.082,57.277 90.424,57.277 15.24,59.182 45.593,59.182 62.357,59.69 17.018,60.96 42.926,60.96 11.049,61.087 53.086,61.087 47.242,61.415 24.257,61.595 26.797,61.595 21.59,61.722 96.647,61.976 59.055,63.373 40.005,63.5 44.45,63.627 67.31,64.135 10.922,64.262 33.528,64.389 61.214,64.516 24.384,64.643 70.104,64.643 21.971,64.77 27.432,64.897 73.152,65.151 88.646,65.278 29.21,65.913 33.528,66.04 41.529,66.294 96.012,66.929 63.373,67.31 71.247,67.437 12.192,67.691 24.511,67.945 15.875,68.326 18.161,68.326 63.881,68.58 94.247,69.951 65.532,70.866 79.375,71.12 83.187,71.12 27.94,71.374 89.535,72.898 74.93,73.787 14.467,75.247 70.866,76.581 19.952,76.815 70.358,78.232 91.44,78.232 42.672,78.867 15.015,80.301 68.199,80.391 44.958,81.026 39.995,81.498 22.537,81.594 43.561,82.423 29.903,83.044 65.659,85.471 64.643,85.852 66.675,86.36 63.881,86.614 65.532,86.614 22.929,87.001 78.486,87.376 64.897,87.503 66.548,87.503 35.623,87.863 65.786,88.392 45.466,89.408 79.629,90.805 33.546,91.741 27.317,92.094 40.386,92.583 75.565,93.472 70.358,94.361 43.497,94.915 73.566,95.848 37.465,96.52 46.99,98.806 60.071,99.314 60.579,100.203 56.896,100.584
HALL_X: C9.1 R1.2 U7.13 | length 35.1
  Top Layer w0.3: U7.13 32.75,34.983 35.69,37.923 40.074,37.923 46.609,44.459 v1(46.609,56.896)
  Bottom Layer w0.2: C9.1@49.396,56.896 C9.1
  Bottom Layer w0.3: v1(46.609,56.896) C9.1@49.396,56.896 ; C9.1 R1.2
HALL_Y: C12.1 R5.2 U7.14 | length 28.5
  Top Layer w0.3: U7.14 32.25,35.272 35.459,38.481 39.624,38.481 43.955,42.812 v1(43.955,44.512)
  Bottom Layer w0.3: v1(43.955,44.512) 44.5,45.056 C12.1
HALL_Z: C22.1 R7.2 U7.15 | length 28.1
  Top Layer w0.3: U7.15 31.75,35.545 35.303,39.097 39.097,39.097 v1(42,42)
  Bottom Layer w0.2: R7.2@52.062,49.276 R7.2
  Bottom Layer w0.3: v1(42,42) 43.251,42 49.149,47.898 C22.1 R7.2@52.062,49.276
NetC1_1: C1.1 U1.1
NetC1_2: C1.2 D3.1 L1.1 U1.8
NetC2_1: C2.1 C3.1 D1.1 U1.2 U1.3
NetC4_2: C4.2 R2.1 R4.2 U1.5
  other v1: 65.532,82.169 65.024,82.677 64.77,100.203 65.151,100.584
NetC10_1: C10.1 U1.6
NetC15_1: C15.1 C16.1 F2.2 U5.1 U5.3
NetC28_1: C28.1 U7.5 Y1.1 | length 6.2
  Top Layer w0.2: U7.5 38.797,29.25 Y1.1 38.911,28.137 C28.1
NetC30_1: C30.1 U7.6 Y1.3 | length 8.9
  Top Layer w0.2: U7.6 36.36,29.75 38.127,31.516 39.834,31.516 40.573,30.777 40.648,30.777 C30.1
NetCON1_1: CON1.1 D2.1 F1.1
NetCON2_1: CON2.1 ESD1.1 R15.1 | length 7.3
  Top Layer w0.2: CON2.1 17.753,21.288 17.753,23.392 18.584,24.223 18.584,24.934 ESD1.1 R15.1
NetCON2_2: CON2.2 ESD2.1 R14.1 | length 6.9
  Top Layer w0.2: CON2.2 21.06,22.827 ESD2.1 20.989,23.08 20.989,23.292 21.06,23.363 21.06,24.108 R14.1
NetCON2_4: CON2.4 ESD3.1 R13.1 | length 6.7
  Top Layer w0.2: CON2.4 20.126,18.177 ESD3.1 24.284,22.335 R13.1
NetCON2_5: CON2.5 ESD4.1 R12.1 | length 7.5
  Top Layer w0.2: CON2.5 22.664,19.129 25.098,19.129 ESD4.1 26.316,20.347 R12.1
NetD1_2: D1.2 F1.2
NetD5_2: D5.2 R9.2 | length 1.7
  Top Layer w0.2: R9.2 40.052,24.265 D5.2
NetL2_1: L2.1 U4.3
NetR1_1: R1.1 U2.3 | length 2.5
  Bottom Layer w0.2: R1.1 R1.1@50.53,58.27
  Bottom Layer w0.3: R1.1@50.53,58.27 U2.3
NetR3_2: R3.2 U1.4
NetR5_1: R5.1 U3.3 | length 2.2
  Bottom Layer w0.3: R5.1 U3.3
NetR6_1: R6.1 R8.2 U4.5
NetR7_1: R7.1 U6.2 | length 1.7
  Bottom Layer w0.2: R7.1@52.048,50.306 R7.1
  Bottom Layer w0.3: R7.1@52.048,50.306 U6.2
NetR9_1: R9.1 U7.2 | length 5.5
  Top Layer w0.2: U7.2 37.21,27.75 R9.1
NetR11_2: R11.2 U7.44 | length 1.8
  Top Layer w0.2: R11.2 30.75,23.884 U7.44
NRST: C31.1 R10.1 U7.7 | length 7.9
  Top Layer w0.2: U7.7 35.584,30.25 37.465,32.131 37.465,34.425 R10.1 39.1,34.552 C31.1
PWM_A: U7.17 U8.23 | length 33.5
  Top Layer w0.2: U7.17 30.75,28.819 38.862,20.707 38.862,18.034 46.821,10.075 U8.23
PWM_B: U7.16 U8.15 | length 29.1
  Top Layer w0.2: U7.16 31.25,29.13 45.105,15.275 U8.15
PWM_C: U7.18 U9.23 | length 22.9
  Top Layer w0.2: U9.23 15.952,49.423 15.952,48.57 16.451,48.071 16.645,48.071 19.885,44.831 22.733,44.831 30.25,37.314 U7.18
PWM_D: U7.19 U9.15 | length 27.6
  Top Layer w0.2: U9.15 10.725,46.679 14.097,43.307 21.971,43.307 29.75,35.528 U7.19
STBY1: U7.41 U8.19 | length 29.9
  Top Layer w0.2: U7.41 29.25,18.375 v1(34.925,12.7) ; v1(47.625,12.7) 47.637,12.688 49.438,12.688 U8.19
  Bottom Layer w0.2: v1(34.925,12.7) v1(47.625,12.7)
STBY2: U7.25 U9.19 | length 25.6
  Top Layer w0.2: U9.19 13.325,46.873 13.491,46.707 14.436,46.707 14.776,46.367 v1(16.405,46.367) ; v1(22.087,32.858) 22.168,32.858 22.276,32.75 U7.25
  Bottom Layer w0.2: v1(16.405,46.367) 17.907,44.865 17.907,36.703 21.731,32.879 22.066,32.879 v1(22.087,32.858)
SWCLK: R12.2 U7.37 | length 4
  Top Layer w0.2: R12.2 27.024,23.595 27.25,23.821 U7.37
SWDIO: R13.2 U7.34 | length 6
  Top Layer w0.2: R13.2 26.67,25.4 26.67,27.94 26.379,28.231 25.719,28.231 U7.34
UART1_RX: R15.2 U7.31 | length 5.4
  Top Layer w0.2: R15.2 23.4,29.75 U7.31
UART1_TX: R14.2 U7.30 | length 8.8
  Top Layer w0.2: v1(21.59,28.702) 23.138,30.25 U7.30 U7.30@25.681,30.231 ; R14.2 v1(23.622,26.67)
  Bottom Layer w0.2: v1(21.59,28.702) v1(23.622,26.67)
pads on no net: U5.4 U7.3 U7.4 U7.10 U7.11 U7.12 U7.20 U7.21 U7.22 U7.32 U7.33 U7.38 U7.39 U7.40

## Polygon pours and split planes (outlines as drawn)
GND on Top Layer "GND_L01_P000" (solid, pour order 0): 0.085,50.001 ccw(c0.043,52.958) 3,53 ccw(c0.043,53.042) 0.085,55.999 cw(c53,53) 50.001,105.915 ccw(c52.96,105.959) 53.004,103 52.996,103 ccw(c53.04,105.959) 55.999,105.915 cw(c53,53) 105.915,55.999 ccw(c105.959,53.04) 103,52.996 ccw(c105.955,52.956) 105.915,50.001 cw(c53,53) 55.999,0.085 ccw(c53.042,0.043) 53,3 ccw(c52.958,0.043) 50.001,0.085 cw(c53,53)
GND on Bottom Layer "GND_L02_P001" (solid, pour order 1): 0.085,50.001 ccw(c0.043,52.958) 3,53 ccw(c0.043,53.042) 0.085,55.999 cw(c53,53) 50.001,105.915 ccw(c52.96,105.959) 53.004,103 52.996,103 ccw(c53.04,105.959) 55.999,105.915 cw(c53,53) 105.915,55.999 ccw(c105.959,53.04) 103,52.996 ccw(c105.955,52.956) 105.915,50.001 cw(c53,53) 55.999,0.085 ccw(c53.042,0.043) 53,3 ccw(c52.958,0.043) 50.001,0.085 cw(c53,53)

## Other copper
Top Layer:
  pour cut-out: 43,33.5 ccw(c53,33.5) 53,23.5 ccw(c53,33.5) 63,33.5 ccw(c53,33.5) 53,43.5 ccw(c53,33.5)
  pour cut-out: 62.5,53 ccw(c72.5,53) 72.5,43 ccw(c72.5,53) 82.5,53 ccw(c72.5,53) 72.5,63 ccw(c72.5,53)
  pour cut-out: 53,62.5 cw(c53,72.5) 43,72.5 cw(c53,72.5) 53,82.5 cw(c53,72.5) 63,72.5 cw(c53,72.5)
  pour cut-out: 33.5,43 cw(c33.5,53) 23.5,53 cw(c33.5,53) 33.5,63 cw(c33.5,53) 43.5,53 cw(c33.5,53)
  region net BO2: 59.69,13.081 63.754,17.145 63.754,21.463 67.31,25.019 67.31,32.639 64.77,32.639 64.643,32.512 64.643,25.527 61.595,22.479 61.595,17.526 58.166,14.097 55.753,14.097 55.753,13.081 55.753,14.097 55.753,13.081
  region net NetR6_1: 64.643,69.723 64.516,69.723 63.754,70.485 63.754,72.009 63.754,73.025 65.659,74.93 67.056,74.93 67.945,74.041 67.945,73.914 67.437,73.406 67.056,73.406 66.675,73.787 65.913,73.787 64.389,72.263 64.389,71.222 65.266,70.346
  region net NetC4_2: 63.669,82.028 64.925,83.284 66.167,82.042 64.911,80.786
  region net NetC4_2: 63.627,100.076 63.627,99.568 64.643,98.552 65.024,98.552 66.546,100.074 66.546,100.205 65.405,101.346 64.897,101.346
  region net NetC1_2: 60.833,89.789 60.198,89.789 54.102,95.885 54.102,96.266 56.134,98.298 60.706,98.298 62.484,96.52 62.484,95.104 64.008,93.58 64.008,92.964
  region net NetC1_1: 65.215,93.662 66.548,92.329 65.024,90.805 63.691,92.138
  region net +12V: 51.308,7.366 51.308,5.588 48.641,5.588 48.514,5.715 48.514,9.525 48.641,9.652 50.292,9.652 50.419,9.525 50.419,7.747 50.8,7.366
  region net +12V: 50.8,20.701 47.371,20.701 47.117,20.447 47.117,16.002 47.371,15.748 50.165,15.748 50.419,16.002 50.419,17.018 50.165,17.272 49.022,17.272 48.768,17.526 48.768,18.669 49.022,18.923 50.8,18.923
  region net +12V: 17.78,53.086 17.78,50.597 17.475,50.292 16.51,50.292 16.383,50.165 16.383,48.768 16.51,48.641 18.034,48.641 18.923,49.53 18.923,50.8 19.304,51.181 19.304,53.086
  region net +12V: 5.334,50.673 6.985,50.673 7.112,50.546 7.112,49.149 7.366,48.895 8.763,48.895 8.89,49.022 8.89,50.292 9.017,50.419 10.16,50.419 10.287,50.292 10.287,47.244 10.16,47.117 5.334,47.117 5.207,47.244 5.207,50.546
  region net NetC2_1: 65.532,93.726 65.532,94.107 66.929,95.504 67.183,95.504 70.104,92.583 70.866,92.583 72.136,93.853 72.644,93.853 74.295,92.202 74.295,91.948 71.12,88.773 70.485,88.773
  region net NetD1_2: 67.818,84.074 69.977,81.915 70.485,81.915 77.089,88.519 77.089,89.027 74.93,91.186 74.549,91.186 67.818,84.455
  region net NetCON1_1: 82.042,82.55 82.042,81.28 76.962,76.2 75.565,76.2 72.517,79.248 72.517,79.756 78.359,85.598 78.994,85.598
  region net 3.3V: 56.261,54.483 56.261,56.261 56.896,56.896 56.896,59.309 57.277,59.69 58.293,59.69 58.547,59.436 58.547,57.201 58.293,56.947 58.293,54.483
  region net NetC15_1: 62.674,64.198 63.754,63.119 63.754,62.992 59.944,59.182 59.182,59.182 56.896,61.468 58.42,62.992 58.547,62.992 59.055,62.484 59.055,62.357 58.166,61.468 58.166,61.214 58.801,60.579 59.055,60.579
  region net +5V: 65.532,70.231 68.453,67.31 68.453,67.056 67.691,66.294 65.024,63.627 64.135,63.627 63.055,64.706 65.532,67.183 65.532,68.58 64.77,69.342 64.77,69.469
  region net NetL2_1: 66.929,71.374 67.31,71.374 69.85,68.834 69.85,68.58 68.967,67.697 68.828,67.697 66.167,70.358 66.167,70.612
  region net +12V: 50.228,95.059 52.514,92.773 53.086,92.202 69.088,76.2 69.088,75.819 69.977,74.93 69.977,73.152 68.707,71.882 67.056,71.882 66.548,72.39 66.167,72.39 65.278,71.501 65.151,71.501 64.643,72.009 64.643,72.19 65.605,73.152 68.072,73.152 68.326,73.406 68.326,74.041 65.405,76.962 61.214,76.962 46.99,91.186 46.99,91.821
  region net NetC10_1: 64.135,97.536 64.389,97.79 64.389,98.298 62.179,100.508 61.434,99.763 63.661,97.536
  region net NetR3_2: 67.31,95.758 68.77,94.297 70.294,95.821 68.834,97.282
  region net AO1: 55.753,10.287 55.753,9.017 69.596,9.017 78.359,17.78 78.359,38.989 75.946,41.402 73.914,41.402 73.279,40.767 73.279,39.243 74.168,38.354 75.057,38.354 76.581,36.83 76.581,18.542 68.326,10.287
  region net AO2: 55.753,12.827 62.831,12.827 67.945,17.941 67.945,39.624 69.723,41.402 71.501,41.402 71.628,41.275 71.628,38.227 69.469,36.068 69.469,17.272 64.008,11.811 55.753,11.811 61.341,11.811 55.753,11.811
  region net BO1: 55.753,15.748 55.753,24.003 60.198,28.448 60.198,33.909 62.738,36.449 66.929,36.449 67.31,36.068 67.31,34.671 66.929,34.29 63.246,34.29 61.849,32.893 61.849,27.686 57.404,23.241 57.404,15.748 56.261,15.748
  region net DO1: 9.144,55.753 10.287,55.753 10.287,67.818 12.446,69.977 22.352,69.977 29.083,76.708 37.465,76.708 38.608,75.565 38.608,73.533 38.862,73.279 41.148,73.279 41.402,73.533 41.402,75.946 38.735,78.613 28.067,78.613 21.082,71.628 12.004,71.628 9.144,68.649 9.144,68.326
  region net DO2: 11.811,55.753 12.827,55.753 12.827,64.643 13.716,65.532 27.051,65.532 29.718,68.199 40.386,68.199 41.275,69.088 41.275,71.12 40.64,71.755 39.37,71.755 38.735,71.12 38.735,69.469 29.083,69.469 26.543,66.929 12.954,66.929 11.811,65.786
  region net CO2: 13.081,55.753 14.097,55.753 14.097,61.087 15.621,62.611 30.861,62.611 32.639,64.389 32.639,67.31 32.385,67.564 30.861,67.564 30.607,67.31 30.607,64.643 29.972,64.008 14.732,64.008 13.081,62.357
  region net CO1: 15.748,55.753 15.748,59.055 17.145,60.452 32.258,60.452 34.417,62.611 34.417,67.31 34.671,67.564 36.195,67.564 36.449,67.31 36.449,61.849 33.528,58.928 17.78,58.928 16.764,57.912 16.764,55.753
Bottom Layer:
  pour cut-out: 43,33.5 ccw(c53,33.5) 53,23.5 ccw(c53,33.5) 63,33.5 ccw(c53,33.5) 53,43.5 ccw(c53,33.5)
  pour cut-out: 62.5,53 ccw(c72.5,53) 72.5,43 ccw(c72.5,53) 82.5,53 ccw(c72.5,53) 72.5,63 ccw(c72.5,53)
  pour cut-out: 53,62.5 cw(c53,72.5) 43,72.5 cw(c53,72.5) 53,82.5 cw(c53,72.5) 63,72.5 cw(c53,72.5)
  pour cut-out: 33.5,43 cw(c33.5,53) 23.5,53 cw(c33.5,53) 33.5,63 cw(c33.5,53) 43.5,53 cw(c33.5,53)
  region net NetC4_2: 65.024,100.965 64.389,100.33 64.389,100.076 67.564,96.901 67.564,85.725 64.643,82.804 64.643,82.423 65.278,81.788 65.659,81.788 68.763,84.892 68.763,97.48 65.278,100.965
  region net +12V: 64.135,19.082 64.135,17.748 65.468,19.082
  region net +12V: 17.907,52.324 19.05,52.324 19.304,52.578 19.304,65.532 17.78,65.532 17.78,52.451
  region net +12V: 16.954,62.928 18.034,61.849 18.034,64.008
  region net +12V: 62.865,78.105 56.896,84.074 38.608,84.074 7.112,52.578 7.112,49.149 6.985,49.022 5.334,49.022 5.207,49.149 5.207,53.467 38.1,86.36 58.928,86.36 65.024,80.264
  region net +12V: 50.546,5.588 50.419,5.715 50.419,7.239 50.546,7.366 53.34,7.366 66.675,20.701 68.008,19.367 54.229,5.588
  region net +12V: 64.008,76.962 69.469,71.501 83.82,57.15 83.82,37.846 66.675,20.701 49.276,20.701 49.149,20.574 49.149,19.05 49.276,18.923 67.564,18.923 85.852,37.211 85.852,59.436 71.628,73.66 66.167,79.121
  region net 3.3V: 42.291,38.481 42.291,37.846 41.783,37.338 41.783,38.227 42.037,38.481
  region net 3.3V: 40.883,37.485 41.656,37.195 41.656,38.354
  region net 3.3V: 40.894,39.116 40.894,37.592 41.656,38.354
  region net 3.3V: 40.894,39.116 42.418,39.116 41.656,38.354
  region net +12V: 62.865,78.105 64.008,76.962 64.516,76.962 66.167,78.613 66.167,79.121 65.024,80.264 64.516,80.264 62.865,78.613
  region net 3.3V: 54.737,56.261 59.055,56.261 59.055,54.483 54.737,54.483
  region net 3.3V: 49.657,52.324 50.927,52.324 50.927,54.737 51.16,54.97 49.424,54.97 49.657,54.737
  region net 3.3V: 49.276,56.261 55.372,56.261 55.372,52.959 55.626,52.705 56.769,52.705 56.769,51.435 53.467,51.435 53.467,52.451 53.975,52.959 53.975,54.61 53.615,54.97 49.022,54.97 49.022,56.007

## Silkscreen, mask and mechanical layers (free items; w line width, h text height)
Top Overlay:
  text "SUN" at 100.059,47.152 h8 r90
Bottom Overlay:
  circle w0.254: c53,33.5 r10
  circle w0.254: c72.5,53 r10
  circle w0.254: c53,72.5 r10
  circle w0.254: c33.5,53 r10
  circle w0.254: c53,53 r30
  circle w0.254: c53,53 r50
Mechanical 1:
  lines w0.254: 52.996,103 ccw(c53.04,105.959) 55.999,105.915 cw(c53,53) 105.915,55.999 ccw(c105.959,53.04) 103,52.996 ccw(c105.955,52.956) 105.915,50.001 cw(c53,53) 55.999,0.085 ccw(c53.042,0.043) 53,3 ccw(c52.958,0.043) 50.001,0.085 cw(c53,53) 0.085,50.001 ccw(c0.043,52.958) 3,53 ccw(c0.043,53.042) 0.085,55.999 cw(c53,53) 50.001,105.915 ccw(c52.96,105.959) 53.004,103

## Text inside footprints (layer, text, board x,y; h text height)
U2: Bottom Overlay "S" at 51.075,59.275 h0.5 r270
U3: Bottom Overlay "S" at 46.725,51.075 h0.5